# Altium PCB PCB2.PcbDoc
Units mm, origin at the board's own origin, x right, y up, seen from the top; angles counter-clockwise.
Board outline 150 x 116.5 mm, 2 copper layers (Top Layer, Bottom Layer); 98 components, 80 nets, 427 pads, 346 vias.
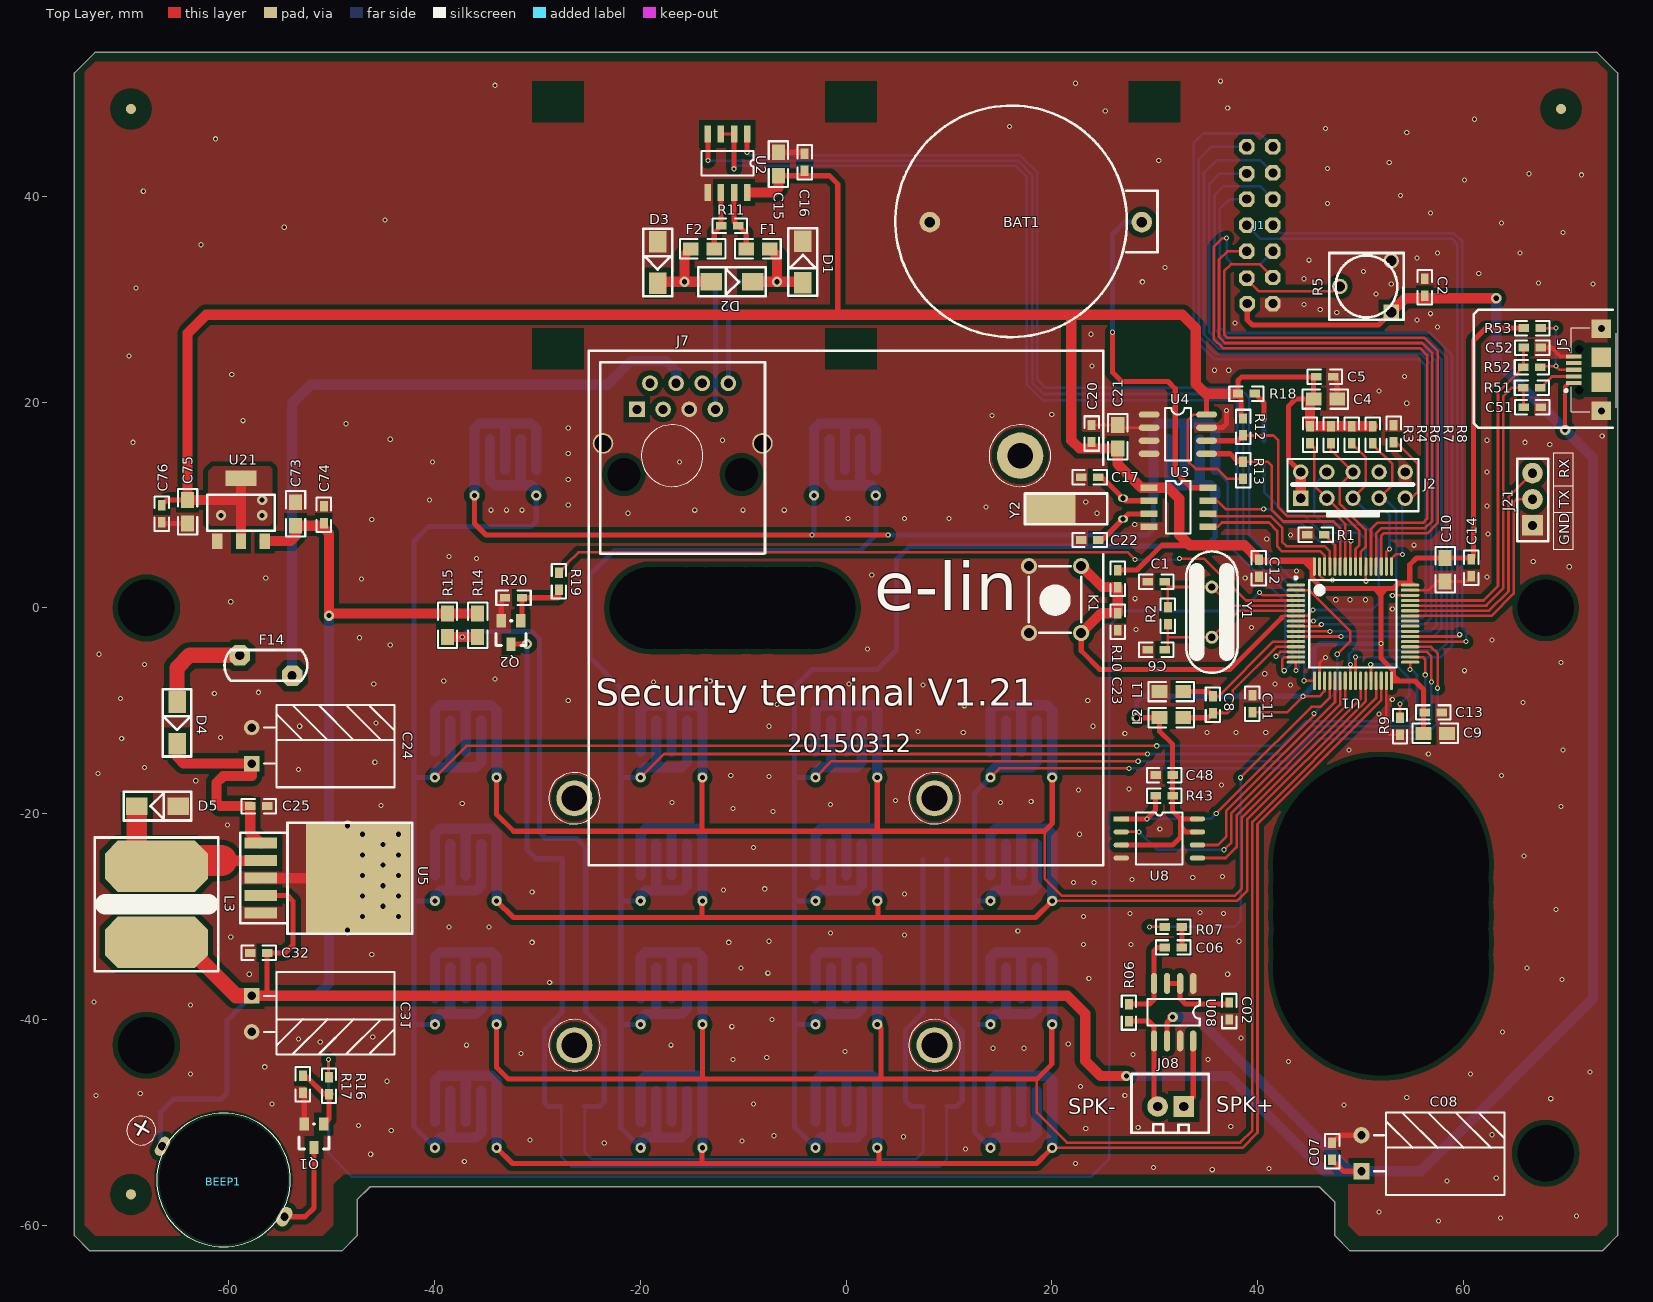
[diagram p0: Top Layer view]
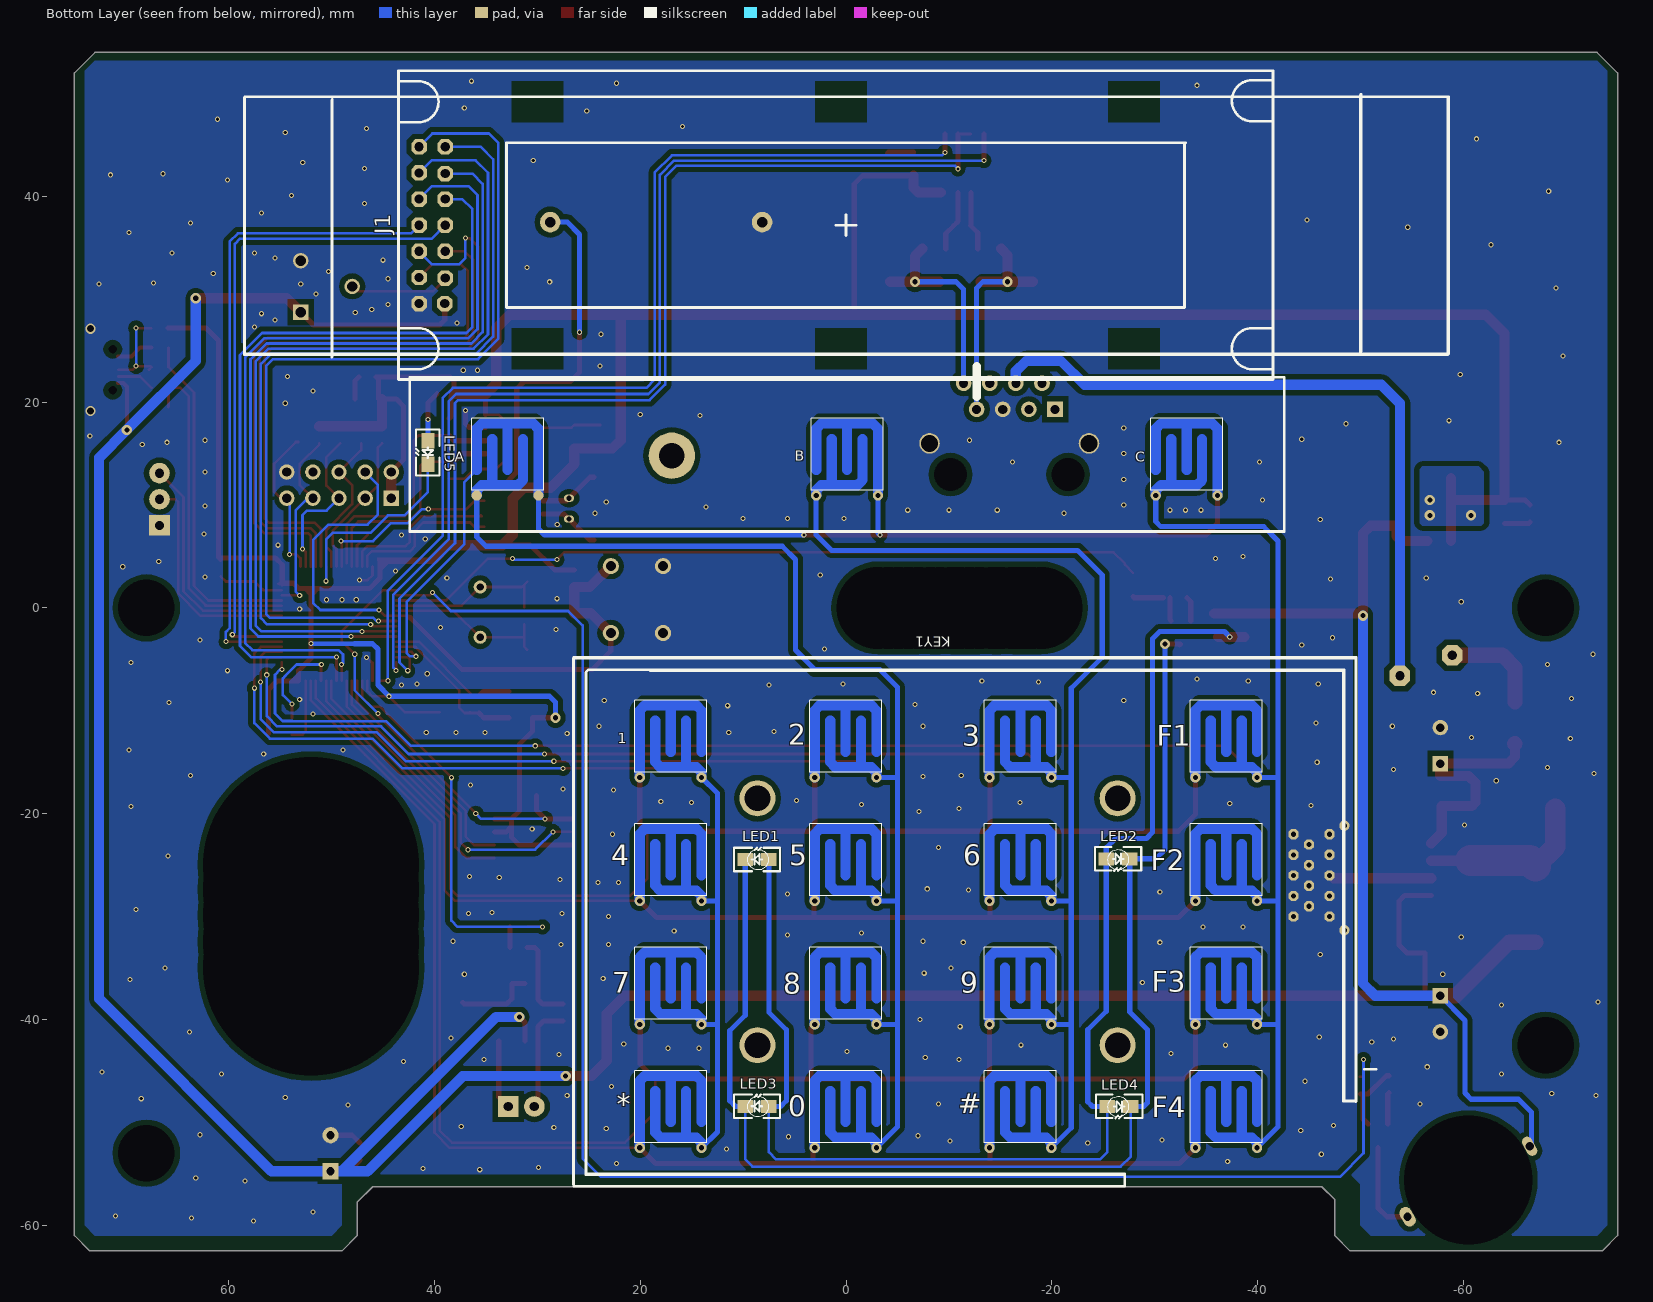
[diagram p1: Bottom Layer view, seen from below]

## Layer stack, top to bottom
Top Solder: solder mask 0.0102, Solder Resist, Dk 3.5
Top Layer: signal copper 0.0356
Dielectric1: dielectric 0.32, FR-4, Dk 4.8
Bottom Layer: signal copper 0.0356
Bottom Solder: solder mask 0.0102, Solder Resist, Dk 3.5

## Board outline
-75,-61 -73.5,-62.5 -49,-62.5 -47.5,-61 -47.5,-57.5 -46.25,-56.25 46,-56.25 47.5,-57.75 47.5,-61 49,-62.5 73.5,-62.5 75,-61 75,52 73,54 -73,54 -75,52

## Design rules (kind name [scope] priority, off if disabled: settings)
Clearance [All] p1: gap=0.5
PolygonConnect [All] p1: connectstyle=Direct reliefconductorwidth=0.5 reliefentries=4 polygonreliefangle="90 Angle" airgapwidth=0.254
RoutingVias [All] p1: holewidth=0.711 width=1.27 viastyle="Through Hole" minholewidth=0.711 minwidth=1.27 maxholewidth=0.711 maxwidth=1.27
SilkToSolderMaskClearance SilkscreenOverComponentPads [IsPad] p1: minsilkscreentomaskgap=0.254 clearancetoexposedcopper=TRUE
SolderMaskExpansion [All] p1: expansion=0.102
Width [All] p1: maxlimit=5 minlimit=0.254 preferedwidth=0.254
28 further rules are at their usual default settings.

## Components (designator, comment, footprint, x,y, rotation, side; value= is the part's Value field where it differs from the comment)
BAT1 "BATT" CR2032 28.75,37.5 r270 top locked
BEEP1 "BEEP" BEEP-12W -66.45,-52.324 r330 top locked
C1 "18p" 0603 30.988,2.54 r180 top locked
C02 "1uF" 0603 37.25,-40 r90 top locked
C2 "0.1uF" 0603 56.25,32 r270 top locked
C4 "0.1uF" 0603 47.344,22.464 r180 top locked
C5 "10uF" 0805 47.738,20.302 r180 top locked
C06 "0.1uF" 0603 31,-33 r0 top locked
C6 "18p" 0603 30.988,-4.064 r180 top locked
C07 "0.1uF" 0603 47.25,-52 r270 top locked
C08 "470uF" RB3.5-w#1 52.5,-47.75 r90 top locked
C8 "0.1uF" 0603 35.668,-10.216 r90 top locked
C9 "10uF/25V" 0805 58.42,-12.192 r180 top locked
C10 "10uF/25V" 0805 58.24,2.572 r90 top locked
C11 "0.1uF" 0603 39.5,-8.5 r270 top
C12 "0.1uF" 0603 40.132,3.048 r90 top locked
C13 "0.1uF" 0603 57.912,-10.16 r180 top locked
C14 "0.1uF" 0603 60.78,3.08 r90 top locked
C15 "10uF" 0805 -6.566,42.004 r90 top locked
C16 "0.1uF" 0603 -4.026,42.512 r90 top locked
C17 "18P" 0603 22.86,12.7 r0 top locked
C20 "0.1uF" 0603 23.876,17.78 r270 top locked
C21 "10uF" 0805 26.416,17.78 r270 top locked
C22 "18P" 0603 22.86,6.604 r0 top locked
C23 "0.1uF" 0603 26.416,-0.508 r270 top locked
C24 "470uF" RB3.5-w#2 -55.372,-8.128 r90 top locked
C25 "0.1uF" 0603 -56.268,-19.26 r180 top locked
C31 "470uF" RB3.5-w#3 -55.372,-44.704 r270 top locked
C32 "0.1uF" 0603 -57.912,-33.528 r0 top locked
C48 "0.1uF" 0603 30.1,-16.25 r0 top locked
C51 "22pF" 0603 65.875,19.5 r0 top locked
C52 "22pF" 0603 65.875,25.3 r0 top locked
C73 "10uF" 0805 -53.5,8 r90 top locked
C74 "0.1uF" 0603 -50.75,8.25 r90 top locked
C75 "10uF" 0805 -64,10.5 r270 top locked
C76 "0.1uF" 0603 -66.5,10 r270 top locked
D1 "TVS" SMB -4.2,31.6 r90 top
D2 "TVS" SMB -13.1,31.7 r0 top
D3 "TVS" SMB -18.3,35.6 r270 top
D4 "B340" SMB -65.024,-9.144 r270 top locked
D5 "B340" SMB -64.904,-19.26 r180 top locked
F1 "FUSE2" 0805 -9.7,34.9 r0 top
F2 "FUSE2" 0805 -12.8,34.9 r180 top
F14 "FUSE2" FUSE-RL60-050 -56.388,-5.588 r180 top locked
J1 "LCD-1602DB" LCD-1602B 43.5,22.2 r0 top locked
J2 "JTAG" JTAG_10 44.196,10.668 r0 top locked
J5 "microb usb" USB_micro 73.425,23.15 r90 top locked
J7 "RJ45" RJ45-1 -20.32,19.304 r180 top locked
J08 "SIP2A-2.54（带槽）" 2.54 27.75,-51 r0 top locked
J21 "2.54-TX" 2.54-TX 68.25,6.5 r90 top locked
K1 "KEY_M" KEY_M 22.86,4.064 r270 top locked
KEY1 "SW-17" KEY-17 -2.032,-18.796 r0 top locked
L1 "100R" 0805 30.48,-8.128 r0 top locked
L2 "100R" 0805 30.48,-10.668 r0 top locked
L3 "33uH" INDUCTOR-1212 -73.032,-22.308 r270 top locked
LED1 "" LED-0805 7.5,-24.45 r0 bottom locked
LED2 "" LED-0805 -25.3,-24.384 r180 bottom locked
LED3 "" LED-0805 7.5,-48.45 r0 bottom locked
LED4 "" LED-0805 -25.4,-48.45 r180 bottom locked
LED5 "LED-R" LED-0805 40.64,16.256 r270 bottom locked
Q1 "3904" SOT-23 -50.758,-50.171 r180 top locked
Q2 "3904" SOT-23 -31.605,-1.242 r180 top locked
R1 "10K" 0603 46.5,7.112 r180 top locked
R2 "1M" 0603 31.284,0.084 r270 top locked
R3 "10K" 0603 45.098,17.65 r270 top locked
R4 "10K" 0603 47.13,17.65 r270 top locked
R5 "10K" RM065-V1 48,31.25 r0 top locked
R06 "22K" 0603 27.5,-38.5 r270 top locked
R6 "10K" 0603 49.162,17.65 r270 top locked
R07 "10K" 0603 31,-31 r0 top locked
R7 "10K" 0603 51.194,17.65 r270 top locked
R8 "10K" 0603 53.226,16.126 r90 top locked
R9 "10K" 0603 53.848,-10.668 r270 top locked
R10 "10K" 0603 26.416,2.032 r90 top locked
R11 "120R" 0603 -10.466,37.156 r180 top locked
R12 "4.7K" 0603 38.6,16.764 r90 top locked
R13 "4.7K" 0603 38.6,14.224 r270 top
R14 "510R" 0805 -35.8,-0.532 r270 top locked
R15 "510R" 0805 -38.732,-0.532 r270 top locked
R16 "1K" 0603 -50.25,-45.599 r270 top locked
R17 "10K" 0603 -52.79,-47.123 r90 top locked
R18 "1K" 0603 39.751,20.828 r180 top locked
R19 "1K" 0603 -27.9,3.4 r270 top
R20 "10K" 0603 -33.144,0.992 r0 top locked
R43 "10K" 0603 31.75,-18.25 r180 top locked
R51 "22" 0603 67.5,21.4 r180 top locked
R52 "22" 0603 67.5,23.4 r180 top locked
R53 "1.5K" 0603 65.875,27.2 r0 top locked
U1 "STM32F103RCT6" LQFP64_N 49.276,-1.524 r0 top locked
U2 "SP3485" SOP-8 -9.614,46.068 r270 top locked
U3 "DS1302" SOP-8 29.464,11.684 r0 top locked
U4 "24C02" SO-8 29.464,18.796 r0 top locked
U5 "LM2596S_5.0" TO-263-5 -56.896,-22.86 r180 top locked
U8 "SST25VF016B" SOIC-8 26.75,-20.5 r0 top locked
U08 "8002" so-8 33.75,-36.5 r270 top locked
U21 "LM1117" SOT-223 -61.1,6.5 r0 top locked
Y1 "8MHz" XTAL_US 35.56,2.032 r270 top locked
Y2 "32.768KHz" cs-308 25.4,8.128 r180 top locked

## Footprints (in the part's own frame and the unit in brackets; to place one, negate y for a bottom-side part, rotate by r counter-clockwise, add the part's x,y. Pads: shape width x height; smd on the part's side, far side on the other; paste and mask are expansions set on the pad)
2.54 [mm]
  rect 2x2 hole 0.9: 1(5.08,2.54)
  round 2 hole 0.9: 2(2.54,2.54)
  silkscreen extent 0,0 7.5,5.7
2.54-TX [mm]
  round 2 hole 0.9: 1(6.604,1.524) 2(4.064,1.524)
  rect 2x2 hole 0.9: 3(1.524,1.524)
  silkscreen extent 0,0 8,3
0603 [mil]
  rect 40x30 smd: 1(0,0) 2(65,0)
  silkscreen extent -33,-28 98,28
0805 [mil]
  rect 60x50 smd: 1(0,0) 2(90,0)
  silkscreen extent -42,-37 132,37
BEEP-12W [mm]
  oval 1x2 hole 0.8: 1(0,0)
  oval 1.2x2 hole 0.8: 2(13.7,0)
CR2032 [mm]
  round 2 hole 1: 1(0,0) 2(0,-20.6)
  silkscreen extent -11.32,-23.95 11.18,1.52
cs-308 [mm]
  oval 1x0.7 hole 0.5: 1(-1.524,-0.508) 2(-1.524,-2.54)
  rect 5x3 smd: 3(5.588,-1.524)
  silkscreen extent 0,-3 8,0
FUSE-RL60-050 [mm]
  oct 2x2 hole 0.9: 1(-2.55,1) 2(2.55,-1)
  silkscreen extent -4.02,-1.5 4.02,1.5
INDUCTOR-1212 [mm]
  oct 5x10 smd: 1(2.8,6) 2(10.2,6)
  silkscreen extent 0,0 13,12
JTAG_10 [mm]
  rect 1.5x1.5 hole 0.9: 1(0,0)
  round 1.5 hole 0.9: 2(0,2.54) 3(2.54,0) 4(2.54,2.54) 5(5.08,0) 6(5.08,2.54) 7(7.62,0) 8(7.62,2.54) 9(10.16,0) 10(10.16,2.54)
  silkscreen extent -1.27,-1.78 11.43,3.81
KEY-17 [mm]
  round 1 hole 0.5: 1(22.075,2.325) 2(16.075,2.325) 3(5.075,2.325) 4(-0.925,2.325) 5(-11.925,2.325) 6(-17.925,2.325) 7(-31.925,2.325) 8(-37.925,2.325) 9(22.075,-9.675) 10(16.075,-9.675) 11(5.075,-9.675) 12(-0.925,-9.675) 13(-11.925,-9.675) 14(-17.925,-9.675) 15(-31.925,-9.675) 16(-37.925,-9.675) 17(22.075,-21.675) 18(16.075,-21.675) 19(5.075,-21.675) 20(-0.925,-21.675) 21(-11.925,-21.675) 22(-17.925,-21.675) 23(-31.925,-21.675) 24(-37.925,-21.675) 25(22.075,-33.675) 26(16.075,-33.675) 27(5.075,-33.675) 28(-0.925,-33.675) 29(-11.925,-33.675) 30(-17.925,-33.675) 31(-31.925,-33.675) 32(-37.925,-33.675) 35(-1.075,29.725) 36(4.925,29.725) 37(-34.075,29.725) 38(-28.075,29.725)
  round 1 smd far side: 33(31.925,29.725) 34(37.925,29.725)
  Bottom Layer lines w1: -37.925,-33.675 -37.925,-33.175 -37.425,-32.675 -33.925,-32.675 -33.425,-32.175 -33.425,-28.175 ; -37.925,-31.175 -37.925,-27.175 -37.425,-26.675 -32.425,-26.675 -31.925,-27.175 -31.925,-33.675 ; -37.925,-21.675 -37.925,-21.175 -37.425,-20.675 -33.925,-20.675 -33.425,-20.175 -33.425,-16.175 ; -37.925,-19.175 -37.925,-15.175 -37.425,-14.675 -32.425,-14.675 -31.925,-15.175 -31.925,-21.675 ; -37.925,-9.675 -37.925,-9.175 -37.425,-8.675 -33.925,-8.675 -33.425,-8.175 -33.425,-4.175 ; -37.925,-7.175 -37.925,-3.175 -37.425,-2.675 -32.425,-2.675 -31.925,-3.175 -31.925,-9.675 ; -37.925,2.325 -37.925,2.825 -37.425,3.325 -33.925,3.325 -33.425,3.825 -33.425,7.825 ; -37.925,4.825 -37.925,8.825 -37.425,9.325 -32.425,9.325 -31.925,8.825 -31.925,2.325 ; -36.425,-32.675 -36.425,-28.175 ; -36.425,-20.675 -36.425,-16.175 ; -36.425,-8.675 -36.425,-4.175 ; -36.425,3.325 -36.425,7.825 ; -34.925,-31.175 -34.925,-26.675 ; -34.925,-19.175 -34.925,-14.675 ; -34.925,-7.175 -34.925,-2.675 ; -34.925,4.825 -34.925,9.325 ; -34.075,29.725 -34.075,36.225 -33.575,36.725 -28.575,36.725 -28.075,36.225 -28.075,32.225 ; -32.575,35.225 -32.575,31.225 -32.075,30.725 -28.575,30.725 -28.075,30.225 -28.075,29.725 ; -31.075,32.225 -31.075,36.725 ; -29.575,30.725 -29.575,35.225 ; -17.925,-33.675 -17.925,-33.175 -17.425,-32.675 -13.925,-32.675 -13.425,-32.175 -13.425,-28.175 ; -17.925,-31.175 -17.925,-27.175 -17.425,-26.675 -12.425,-26.675 -11.925,-27.175 -11.925,-33.675 ; -17.925,-21.675 -17.925,-21.175 -17.425,-20.675 -13.925,-20.675 -13.425,-20.175 -13.425,-16.175 ; -17.925,-19.175 -17.925,-15.175 -17.425,-14.675 -12.425,-14.675 -11.925,-15.175 -11.925,-21.675 ; -17.925,-9.675 -17.925,-9.175 -17.425,-8.675 -13.925,-8.675 -13.425,-8.175 -13.425,-4.175 ; -17.925,-7.175 -17.925,-3.175 -17.425,-2.675 -12.425,-2.675 -11.925,-3.175 -11.925,-9.675 ; -17.925,2.325 -17.925,2.825 -17.425,3.325 -13.925,3.325 -13.425,3.825 -13.425,7.825 ; -17.925,4.825 -17.925,8.825 -17.425,9.325 -12.425,9.325 -11.925,8.825 -11.925,2.325 ; -16.425,-32.675 -16.425,-28.175 ; -16.425,-20.675 -16.425,-16.175 ; -16.425,-8.675 -16.425,-4.175 ; -16.425,3.325 -16.425,7.825 ; -14.925,-31.175 -14.925,-26.675 ; -14.925,-19.175 -14.925,-14.675 ; -14.925,-7.175 -14.925,-2.675 ; -14.925,4.825 -14.925,9.325 ; -1.075,29.725 -1.075,36.225 -0.575,36.725 4.425,36.725 4.925,36.225 4.925,32.225 ; -0.925,-33.675 -0.925,-33.175 -0.425,-32.675 3.075,-32.675 3.575,-32.175 3.575,-28.175 ; -0.925,-31.175 -0.925,-27.175 -0.425,-26.675 4.575,-26.675 5.075,-27.175 5.075,-33.675 ; -0.925,-21.675 -0.925,-21.175 -0.425,-20.675 3.075,-20.675 3.575,-20.175 3.575,-16.175 ; -0.925,-19.175 -0.925,-15.175 -0.425,-14.675 4.575,-14.675 5.075,-15.175 5.075,-21.675 ; -0.925,-9.675 -0.925,-9.175 -0.425,-8.675 3.075,-8.675 3.575,-8.175 3.575,-4.175 ; -0.925,-7.175 -0.925,-3.175 -0.425,-2.675 4.575,-2.675 5.075,-3.175 5.075,-9.675 ; -0.925,2.325 -0.925,2.825 -0.425,3.325 3.075,3.325 3.575,3.825 3.575,7.825 ; -0.925,4.825 -0.925,8.825 -0.425,9.325 4.575,9.325 5.075,8.825 5.075,2.325 ; 0.425,35.225 0.425,31.225 0.925,30.725 4.425,30.725 4.925,30.225 4.925,29.725 ; 0.575,-32.675 0.575,-28.175 ; 0.575,-20.675 0.575,-16.175 ; 0.575,-8.675 0.575,-4.175 ; 0.575,3.325 0.575,7.825 ; 1.925,32.225 1.925,36.725 ; 2.075,-31.175 2.075,-26.675 ; 2.075,-19.175 2.075,-14.675 ; 2.075,-7.175 2.075,-2.675 ; 2.075,4.825 2.075,9.325 ; 3.425,30.725 3.425,35.225 ; 16.075,-33.675 16.075,-33.175 16.575,-32.675 20.075,-32.675 20.575,-32.175 20.575,-28.175 ; 16.075,-31.175 16.075,-27.175 16.575,-26.675 21.575,-26.675 22.075,-27.175 22.075,-33.675 ; 16.075,-21.675 16.075,-21.175 16.575,-20.675 20.075,-20.675 20.575,-20.175 20.575,-16.175 ; 16.075,-19.175 16.075,-15.175 16.575,-14.675 21.575,-14.675 22.075,-15.175 22.075,-21.675 ; 16.075,-9.675 16.075,-9.175 16.575,-8.675 20.075,-8.675 20.575,-8.175 20.575,-4.175 ; 16.075,-7.175 16.075,-3.175 16.575,-2.675 21.575,-2.675 22.075,-3.175 22.075,-9.675 ; 16.075,2.325 16.075,2.825 16.575,3.325 20.075,3.325 20.575,3.825 20.575,7.825 ; 16.075,4.825 16.075,8.825 16.575,9.325 21.575,9.325 22.075,8.825 22.075,2.325 ; 17.575,-32.675 17.575,-28.175 ; 17.575,-20.675 17.575,-16.175 ; 17.575,-8.675 17.575,-4.175 ; 17.575,3.325 17.575,7.825 ; 19.075,-31.175 19.075,-26.675 ; 19.075,-19.175 19.075,-14.675 ; 19.075,-7.175 19.075,-2.675 ; 19.075,4.825 19.075,9.325 ; 31.925,29.725 31.925,36.225 32.425,36.725 37.425,36.725 37.925,36.225 37.925,32.225 ; 33.425,35.225 33.425,31.225 33.925,30.725 37.425,30.725 37.925,30.225 37.925,29.725 ; 34.925,32.225 34.925,36.725 ; 36.425,30.725 36.425,35.225
KEY_M [mil]
  round 62 hole 38: 1(0,0) 1(255.91,0) 2(0,-200) 2(255.91,-200)
  silkscreen extent 0,-200 255,0
LCD-1602B [mm]
  oct 1.5x1.5 hole 0.9: 1(-4.5,7.38) 2(-2,7.38) 3(-4.54,9.86) 4(-2,9.92) 5(-4.54,12.46) 6(-2,12.46) 7(-4.54,15) 8(-2,15) 9(-4.54,17.54) 10(-2,17.54) 11(-4.54,20.02) 12(-2,20.08) 13(-4.54,22.62) 14(-2,22.62)
LED-0805 [mil]
  rect 60x50 smd: 1(0,0) 2(90,0)
  silkscreen extent -43,-46 134,45
LQFP64_N [mm] "Thin QFP, 64-Leads, Body 10x10mm, Pitch 0.5mm, IPC Medium Density"
  oval 1.8x0.3 smd: 1(-5.55,3.75) 2(-5.55,3.25) 3(-5.55,2.75) 4(-5.55,2.25) 5(-5.55,1.75) 6(-5.55,1.25) 7(-5.55,0.75) 8(-5.55,0.25) 9(-5.55,-0.25) 10(-5.55,-0.75) 11(-5.55,-1.25) 12(-5.55,-1.75) 13(-5.55,-2.25) 14(-5.55,-2.75) 15(-5.55,-3.25) 16(-5.55,-3.75) 33(5.55,-3.75) 34(5.55,-3.25) 35(5.55,-2.75) 36(5.55,-2.25) 37(5.55,-1.75) 38(5.55,-1.25) 39(5.55,-0.75) 40(5.55,-0.25) 41(5.55,0.25) 42(5.55,0.75) 43(5.55,1.25) 44(5.55,1.75) 45(5.55,2.25) 46(5.55,2.75) 47(5.55,3.25) 48(5.55,3.75)
  oval 0.3x1.8 smd: 17(-3.75,-5.55) 18(-3.25,-5.55) 19(-2.75,-5.55) 20(-2.25,-5.55) 21(-1.75,-5.55) 22(-1.25,-5.55) 23(-0.75,-5.55) 24(-0.25,-5.55) 25(0.25,-5.55) 26(0.75,-5.55) 27(1.25,-5.55) 28(1.75,-5.55) 29(2.25,-5.55) 30(2.75,-5.55) 31(3.25,-5.55) 32(3.75,-5.55) 49(3.75,5.55) 50(3.25,5.55) 51(2.75,5.55) 52(2.25,5.55) 53(1.75,5.55) 54(1.25,5.55) 55(0.75,5.55) 56(0.25,5.55) 57(-0.25,5.55) 58(-0.75,5.55) 59(-1.25,5.55) 60(-1.75,5.55) 61(-2.25,5.55) 62(-2.75,5.55) 63(-3.25,5.55) 64(-3.75,5.55)
  silkscreen extent -5.67,-4.25 4.25,4.57, body extent -5,-5 5,5, height 1.6
RB3.5-w#1 [mil]
  rect 62x62 hole 32: 1(-275.59,94.49)
  round 62 hole 32: 2(-137.8,94.49)
  silkscreen extent -366,-453 -51,47
RB3.5-w#2 [mil]
  rect 59.06x59.06 hole 32: 1(-275.59,94.49)
  round 59.06 hole 32: 2(-137.8,94.49)
  silkscreen extent -366,-453 -51,47
RB3.5-w#3 [mil]
  rect 59.06x59.06 hole 32: 1(-275.59,-94.49)
  round 59.06 hole 32: 2(-137.8,-94.49)
  silkscreen extent -366,-47 -51,453
RJ45-1 [mil]
  rect 60x60 hole 35: 1(0,0)
  round 60 hole 35: 2(-50,-100) 3(-100,0) 4(-150,-100) 5(-200,0) 6(-250,-100) 7(-300,0) 8(-350,-100)
  round 78.74 hole 64.96: 9(129.92,130) 10(-480.31,130)
  oct 0x0 hole 125.98: ""(-400,250) ""(50,250)
  silkscreen extent -490,-180 140,553
RM065-V1 [mm]
  rect 1.5x1.5 hole 1: 1(5,-2.5)
  round 1.5 hole 1: 2(0,0) 3(5,2.5)
  silkscreen extent -1.02,-3.25 6.2,3.25
SMB [mm]
  rect 2.1x1.7 smd: 1(0,0) 2(4.05,0)
  silkscreen extent -1.25,-1.4 5.3,1.4
SO-8 [mil]
  oval 80x24 smd: 1(0,0) 2(0,-50) 3(0,-100) 4(0,-150) 5(220,-150) 6(220,-100) 7(220,-50) 8(220,0)
  silkscreen extent 60,-175 160,25
so-8 [mil]
  oval 80x24 smd: 1(0,0) 2(0,-50) 3(0,-100) 4(0,-150) 5(220,-150) 6(220,-100) 7(220,-50) 8(220,0)
  silkscreen extent 60,-175 160,25
SOIC-8 [mm]
  rect 1.5x0.48 smd: 1(0,0)
  oval 1.5x0.48 smd: 2(0,-1.27) 3(0,-2.54) 4(0,-3.81) 5(7.41,-3.81) 6(7.41,-2.54) 7(7.41,-1.27) 8(7.41,0)
  silkscreen extent 1.43,-4.44 5.97,0.64
SOP-8 [mil]
  rect 65x25 smd: 1(0,0) 2(0,-50) 3(0,-100) 4(0,-150) 5(224.41,-150) 6(224.41,-100) 7(224.41,-50) 8(224.41,0)
  silkscreen extent 65,-175 159,25
SOT-23 [mil]
  rect 36x50 smd: 1(0,0) 2(75,0) 3(37.5,90)
  silkscreen extent -20,0 95,95
SOT-223 [mm]
  rect 1x1.5 smd: 1(0,0) 2(2.3,0) 3(4.6,0)
  rect 3x1.5 smd: 4(2.3,6.096)
  silkscreen extent -1,1.02 5.59,4.52
TO-263-5 [mm]
  rect 3.176x1.07 smd: 1(0,0) 2(0,1.7) 3(0,3.4) 4(0,5.1) 5(0,6.8)
  round 1 hole 0.5: 6(-8.45,-1.695) 8(-8.45,8.465)
  rect 10.16x10.668 smd: 7(-9.5,3.404)
  silkscreen extent -14.73,-2 1.98,8.8
USB_micro [mm]
  rect 1.8x1.9 smd: 0(-4,0) 0(4,0)
  round 0 hole 0.8: 0(-2,2.15) 0(2,2.15)
  rect 1.9x1.9 smd: 0(-1.2,0) 0(1.2,0)
  rect 0.4x1.5 smd: 1(-1.3,2.675) 2(-0.65,2.675) 3(0,2.675) 4(0.65,2.675) 5(1.3,2.675)
  silkscreen extent -4.06,-1.45 4.06,3.55
XTAL_US [mil]
  round 50 hole 28: 1(0,0) 2(192.13,0)
  silkscreen extent -136,-98 328,98

## Part data
BAT1: library part BAT
C1 C02 C6: library part CAP, "陶瓷电容"
C2 C4 C5 C06 C07 C08 C8 C9 C10 C11 C12 C13 C14 C15 C16 C20 C21 C23 C24 C31 C48 C51 C52 C73 C74 C75 C76: library part CAP
C17 C22 C25 C32: library part C
D1 D2 D3: "SMBJ12CA"
D4: library part 1N5824(SS54), "肖特基二极管"
D5: library part DIODE
F1 F2: "SMD0805P010TS"
F14: "RL60-050"
J2: library part JTAG_10
J08: library part SIP2A-2.50（带槽）
L1 L2 L3: library part INDUCTOR
LED1 LED2 LED3 LED4: library part LED, "蓝色LED"
LED5: library part LED-RED, "绿色LED"
Q1 Q2: library part NPN1
R1 R9 R10 R14 R15 R43 R51 R52 R53: library part RES1
R2 R3 R4 R06 R6 R07 R7 R8 R11 R12 R13: library part RES-1%, "高精度电阻"
R5: library part POT2
R16 R17 R19 R20: library part R
R18: library part Res
U1: library part STM32F103RBT6
U2: library part MAX3485
U3: "实时时钟"
U4: library part 24C256
U5: "3A开关电源芯片"
U8: library part W25X16, "W25X16;SST25VF016;MX25L1605"
Y1 Y2: library part XTAL, "Crystal Oscillator"

## Free pads (board coordinates)
  oct 1x1 hole 0.5: 0(-43.5,-22) 1(-43.5,-24) 2(-43.5,-26) 3(-43.5,-28) 4(-43.5,-30) 5(-45,-23) 6(-45,-25) 7(-45,-27) 8(-45,-29) 9(-47,-30) 10(-47,-28) 11(-47,-26) 12(-47,-24) 13(-47,-22)
  round 1 smd mask+1: 2(-69.5,-57) 2(-69.5,48.5) 2(69.5,48.5)
  round 0 hole 5.5: ""(-68,-42.5) ""(-68,0) ""(68,-53) ""(68,0)
  round 0 hole 12.5: ""(-60.5,-55.6)
  round 3.5 hole 2.5: ""(-26.4,-42.5) ""(-26.4,-18.5) ""(8.6,-42.5) ""(8.6,-18.5)
  round 0 hole 8: ""(-18.999,0) ""(-18,0) ""(-17.069,0) ""(-16.2,0) ""(-15.062,0) ""(-14.2,0) ""(-13.005,0) ""(-12,0) ""(-11.049,0) ""(-10.2,0) ""(-9.144,0) ""(-8.2,0) ""(-7.061,0) ""(-6.1,0) ""(-5.105,0) ""(-4.1,0) ""(-3.099,0)
  round 4.5 hole 2.5: ""(16.925,14.8)
  round 0 hole 21: ""(51.994,-34.95) ""(51.994,-32.461) ""(51.994,-29.87) ""(51.994,-27.356) ""(51.994,-24.968)

## Via types
v1: diameter 0.5, hole 0.3, Top Layer to Bottom Layer, tented both sides, 332 vias
v2: diameter 1, hole 0.5, Top Layer to Bottom Layer, tented both sides, 12 vias
v3: diameter 1, hole 0.7, Top Layer to Bottom Layer, tented both sides, 2 vias

## Nets (pads, with @x,y where several pads share a name; then routed paths per layer and width w, separated by ;. In a path a pad name is that pad's centre, name@x,y a point inside that pad or via, vN(x,y) a via of type N, cw(c..) or ccw(c..) an arc to the next point about the centre after c; other vN are vias at no path point)
485_A: D2.1 D3.2 F2.2 J7.7 | length 23.5
  Top Layer w1: D3.2@-18.15,31.7 v2(-15.7,31.7) ; F2.2 -15.7,34.286 v2(-15.7,31.7) ; D2.1 v2(-15.7,31.7)
  Bottom Layer w0.5: v2(-15.7,31.7) -13.3,31.7 -12.7,31.1 J7.7
485_B: D1.1 D2.2 F1.2 J7.8 | length 22.4
  Top Layer w1: D2.2 v2(-6.7,31.7) ; F1.2 -6.7,34.186 v2(-6.7,31.7) ; D1.1@-4.3,31.7 v2(-6.7,31.7)
  Bottom Layer w0.5: J7.8 -11.43,30.97 -10.7,31.7 v2(-6.7,31.7)
BEEP: R16.1 U1.3 | length 161.5
  Top Layer w0.254: v1(-50.3,-43.9) -50.3,-45.549 R16.1@-49.949,-45.549 ; v1(40.2,1.5) 40.474,1.226 U1.3 42.274,1.226
  Bottom Layer w0.254: v1(-50.3,-43.9) -50.3,-53 -48,-55.3 23.8,-55.3 25.6,-53.5 25.6,-1.7 27,-0.3 38.4,-0.3 v1(40.2,1.5)
DAC_OUT1: R07.1 U1.20 | length 38
  Top Layer w0.254: v1(29.5,-31) R07.1 ; v1(38.358,-16.5) 45.239,-9.619 46.131,-9.619 47.026,-8.724 U1.20
  Bottom Layer w0.254: v1(29.5,-31) 37.75,-31 38.358,-30.392 v1(38.358,-16.5)
DS_IO: U1.61 U3.6 | length 15.4
  Top Layer w0.254: U3.6@35.5,8.992 35.408,8.9 41.3,8.9 42.4,7.8 42.4,6.4 42.8,6 46.5,6 47.026,5.474 U1.61
DS_RST: U1.62 U3.5 | length 14.8
  Top Layer w0.254: U3.5 36.1,7.874 36.531,8.305 41.095,8.305 41.9,7.5 41.9,6 42.4,5.5 46.1,5.5 46.526,5.074 U1.62
DS_SCLK: U1.57 U3.7 | length 18.1
  Top Layer w0.254: U3.7 36.086,10.414 36.9,9.6 v1(40.6,9.6) ; U1.57 49.026,6.426 v1(49.1,6.5)
  Bottom Layer w0.254: v1(40.6,9.6) 41.234,9.6 42.588,8.246 44.221,8.246 45.967,6.5 v1(49.1,6.5)
F_CS: R43.2 U1.2 U8.1 | length 42.1
  Top Layer w0.254: v1(35.986,-19.986) 45.5,-10.471 v1(45.5,-10.25) ; U1.2 45.024,1.726 49,-2.25 49,-3.25 v1(47.75,-4.5)
  Top Layer w0.5: U8.1 v1(29.25,-20.5) 30.099,-19.651 R43.2
  Bottom Layer w0.254: v1(29.25,-20.5) 35.471,-20.5 v1(35.986,-19.986) ; v1(45.5,-10.25) 47.75,-8 v1(47.75,-4.5)
GND: BAT1.2 C1.2 C2.1 C02.1 C4.1 C5.1 C6.2 C07.1 C08.2 C9.1 C10.1 C11.1 C12.1 C13.1 C14.1 C15.2 C16.2 C17.1 C20.1 C21.1 C22.1 C23.2 C24.2 C25.1 C31.2 C32.1 C48.1 C51.2 C52.2 C73.2 C74.2 C75.2 C76.2 D1.2 D3.1 D5.1 J1.2 J2.10 J5.0@73.425,19.15 J5.0@73.425,27.15 J5.5 J7.5 J7.9 J7.10 J21.3 K1.2 L1.1 pad.0 pad.1 pad.2@-43.5,-26 pad.3 pad.4 pad.5 pad.6 pad.7 pad.8 pad.9 pad.10 pad.11 pad.12 pad.13 Q1.2 Q2.2 R1.2 R5.3 R8.2 R9.2 R17.1 R20.1 U1.18 U1.31 U1.47 U1.63 U2.5 U3.4 U4.1 U4.2 U4.3 U4.4 U4.7 U5.3 U5.5 U5.6 U5.7 U5.8 U08.1 U8.4 U08.7 U21.1 Y2.3 | length 56.1
  Top Layer w0.254: C20.1 C21.1 26.67,17.526 U4.2 ; U1.18 46.026,-5.326 46.074,-5.326 v1(46.6,-4.8) ; U1.63 46.026,3.174 46.5,2.7 v1(47.3,2.7) ; U1.31 52.526,-12.026 52.819,-12.319 R9.2 ; U1.47 56.626,1.726 56.9,2 57.472,2.572 C10.1 60.272,2.572 C14.1
  Top Layer w0.4: C52.2 68.6,25.3 69.45,24.45 J5.5
  Top Layer w0.5: C76.2 -66.365,8.214 C75.2 ; R17.1 -52.663,-47.25 Q1.2 ; Q2.2 -33.51,0.626 R20.1 ; C15.2 -4.153,44.29 C16.2 ; U4.7 36.626,17.526 37,17.9 v1(37,19.2) ; C07.1 48,-51.25 C08.2 ; C4.1 47.738,22.07 C5.1
  Top Layer w1: U5.3 -47.4,-26.26 U5.7
  other v1: 57.6,-59.6 63.6,-59.3 71,-59.1 51.8,-58.7 58.4,-55.7 63.2,-55.4 35.6,-54.6 41.1,-54.5 29.9,-54.4 22.3,-54 -37.1,-53.8 -46.2,-53.1 11.6,-52.6 -23.5,-52 -10.1,-51.8 -30.7,-51.7 5.6,-51.4 -7,-51.3 62.8,-51.2 -44.2,-50.8 23.3,-50.6 28.4,-50.5 37.4,-50.4 -47.4,-50.3 48.4,-48.3 -55.8,-48.2 -9,-48.2 68.5,-47.7 54.5,-47.6 -72.9,-47.4 27.1,-47.4 -68.6,-47.2 22.8,-46.5 -44.6,-46 -63.7,-45.3 60.7,-45.3 72.3,-45.1 -56.5,-44.6 43,-44.1 -11,-43.9 35.2,-43.9 -7.7,-43.7 27.9,-43.4 -31.6,-43.3 -0.1,-43.1 14.3,-42.8 17.3,-42.8 -36.9,-42.5 -17,-42.5 21.6,-42.4 -51.1,-42.2 -53.2,-41.9 38.4,-41.8 -46,-41.7 63.8,-41.2 -11.1,-40.7 -7.2,-40 -63.7,-38.6 -73.1,-38.3 -28.8,-36.4 69.6,-36.1 23.6,-36 -58,-35.6 37.1,-35.6 -7.6,-35.5 -10.2,-35 66.2,-35 -46.1,-33.7 23.1,-32.7 27.7,-32.7 -30.5,-32.5 -11.4,-32.5 -7.5,-32.4 38.2,-32.4 -59.8,-32 5.7,-31.8 -1.5,-31.6 16.7,-31.4 -38.6,-31 -34.7,-31 23.1,-30 27.6,-29.7 36.7,-29.7 34.4,-29.6 69,-29.3 5.7,-27.8 -30.5,-27.6 -11.9,-27.4 -7.9,-27.3 22.1,-26.7 24.1,-26.7 27.8,-26.4 33.7,-26.2 36.6,-26.1 65.9,-24.1 -9,-23.3 22.7,-22 30.5,-21.5 -60.1,-21.1 -7.1,-19.8 -11,-19.5 69.5,-19.3 -45.2,-19.2 -1.5,-19.1 -37.3,-19 -16.9,-18.9 15,-18.9 18,-18.8 4.8,-18.7 22.6,-17.7 27.5,-17.6 36.5,-17.2 -63.2,-16.8 -7.5,-16.4 -11.2,-16.3 63.7,-16.3 -72.7,-16.1 -53.2,-15.7 -68.2,-15.5 -45.8,-15 56.6,-14.2 48.9,-13.8 69.7,-13.8 -70.4,-12.7 -60.8,-12.6 27.1,-12.2 11.4,-12.1 35.1,-12.1 37.9,-12.1 40.8,-12.1 7,-12 -53.1,-11.5 -7.5,-11.5 24,-11.5 -45.7,-11.2 51.8,-10.3 11.5,-9.5 -6.7,-9.4 65.8,-9.2 -27,-9 23.5,-9 53.1,-8.9 -70.5,-8.8 -61.4,-8.3 -57.1,-8.2 7.5,-7.5 43.2,-7.5 -45.9,-7.4 0.3,-7.4 41.7,-7.4 -18.7,-7.2 -39.1,-7.1 -13.2,-7.1 -34.1,-6.9 40.7,-6.4 60.1,-6.1 -68.2,-5.5 69.5,-5.3 -72.6,-4.5 2.1,-4 -44.3,-3.6 62.8,-3.1 -47.3,-2.9 28.2,-2.1 39.4,-1.9 53.1,-0.1 -59.8,0.6 47.6,0.8 49,0.8 50.5,0.8 28.1,0.9 -47.1,2.8 -56.4,2.9 38.8,2.9 62.3,3 2.5,3.2 43.8,3.6 70.3,4 66.8,4.5 -35.9,4.8 -38.6,5 55.2,6.1 40.9,6.7 43.2,7.1 62.4,7.2 28.067,8.103 -46.1,8.6 0.2,8.7 5.7,8.7 10,8.7 -21.2,9.2 24.4,9.2 -34.5,9.5 -33,9.5 -31.5,9.5 -14.7,9.5 -10,9.5 -6,9.5 13.6,9.8 62.3,9.9 -27,10 23.3,10.3 -40.5,10.5 -27,12.5 62.3,13.2 -40.2,14.2 -16.2,14.2 -27,15 68.4,15.9 -69.3,16.1 66,16.1 -12,16.3 62.3,16.3 -44.3,16.4 73.5,16.7 -27,17.5 -48.6,17.9 -58.6,18.2 14.2,18.7 20,18.8 54.5,19.9 51.8,21.1 54.3,22.5 -59.7,22.7 35.8,23.1 37.2,23.1 23.9,23.5 -69.7,24.5 23.8,26.6 57.5,27.3 37.8,27.7 55.5,28 56.8,28.6 47.7,28.7 46.1,29 44.5,29.5 51.5,30.5 -69,31.1 53,31.5 72.6,31.5 67.3,31.6 28.8,31.7 44.5,32 61.5,32.5 50.3,32.7 31,33.1 45,33.8 55.5,34 57.5,34.5 65.5,34.5 -62.7,35.3 69.7,36.5 -54.6,37 63.7,37.4 -44.8,37.7 56.8,38.4 46.8,39.3 53.9,40.1 -68.3,40.5 60.1,41.6 71.5,42.1 66.4,42.2 46.8,42.7 52.8,43.3 30.4,43.5 -61.3,45.6 54.5,46.2 46.6,46.6 15.9,46.8 61.1,47.5 25.2,48.3 37.1,48.6 -34.1,50.8 22.3,51 36.4,51.2
  other v3: 73.425,19.15 73.425,27.15
I2C1_SCL: R12.1 U1.58 U4.6 | length 24.9
  Top Layer w0.254: R12.1 41.536,16.764 42,16.3 42,9.8 42.9,8.9 47.8,8.9 48.526,8.174 U1.58@48.526,4.374
  Top Layer w0.5: U4.6 38.092,16.256 R12.1
I2C1_SDA: R13.1 U1.59 U4.5 | length 22.7
  Top Layer w0.254: 38.1,14.224 40.976,14.224 41.4,13.8 41.4,9.5 42.5,8.4 47.4,8.4 48.026,7.774 U1.59
  Top Layer w0.5: U4.5 37.338,14.986 38.1,14.224 R13.1
JTCK: J2.9 R8.1 U1.49 | length 15
  Top Layer w0.254: U1.49 53.026,4.817 53.416,5.207 v1(54.077,5.207) ; R8.1 53.474,16.126 55.6,14 55.6,11.3 54.968,10.668 J2.9
  Bottom Layer w0.254: v1(54.077,5.207) 54.077,10.389 J2.9
JTDI: J2.5 R6.2 U1.50 | length 15.7
  Top Layer w0.254: R6.2 50.5,14.661 50.5,11.892 J2.5 ; U1.50 52.526,5.434 v1(52.832,5.74)
  Bottom Layer w0.254: J2.5 50.495,9.449 52.4,9.449 52.832,9.017 v1(52.832,5.74)
JTDO: J2.6 R4.2 U1.55 | length 14.6
  Top Layer w0.254: R4.2 47.13,15.354 J2.6 48,11.932 48,10.1 50.5,7.6 50.5,5.9 50.026,5.426 U1.55
JTMS: J2.7 R7.2 U1.46 | length 19
  Top Layer w0.254: R7.2 51.194,15.906 53.1,14 53.1,11.952 J2.7 ; v1(53.1,1.2) 53.126,1.226 U1.46
  Bottom Layer w0.254: J2.7 52.299,10.668 53.467,9.5 53.467,1.567 v1(53.1,1.2)
JTRST: J2.3 R3.2 U1.56 | length 14.1
  Top Layer w0.254: R3.2 45.5,15.597 45.5,11.904 J2.3 46.736,10.664 49.9,7.5 49.9,6.1 49.526,5.726 U1.56
KEY_LED: R19.1 U1.4 | length 74.5
  Top Layer w0.254: R19.1 -27.1,4.2 -27.1,4.3 -26,5.4 27.4,5.4 v1(28.1,4.7) ; v1(32.4,4.8) 34.8,4.8 38.874,0.726 U1.4
  Bottom Layer w0.254: v1(28.1,4.7) 32.3,4.7 v1(32.4,4.8)
NetBAT1_1: BAT1.1 U3.8 | length 35.4
  Top Layer w0.5: v1(25.9,26.8) 25.9,22.9 26.8,22 31.3,22 32,21.3 32,13.2 33.516,11.684 U3.8
  Bottom Layer w0.5: v1(25.9,26.8) 25.9,36.3 27.1,37.5 BAT1.1
NetBEEP1_2: BEEP1.2 Q1.3 | length 10.1
  Top Layer w0.5: BEEP1.2 -52.574,-59.174 -51.711,-58.311 -51.711,-53.9 ; -51.711,-54.961 Q1.3
NetC1_1: C1.1 R2.1 U1.5 Y1.1 | length 15.9
  Top Layer w0.254: C1.1 C1.1@31.284,2.244 ; R2.1 C1.1@31.284,2.244 ; U1.5 37.366,0.226 Y1.1 31.496,2.032 C1.1@31.284,2.244
NetC02_2: C02.2 U08.2 U08.3 | length 7.8
  Top Layer w0.5: U08.3 U08.2 32.48,-37.98 33,-38.5 37.099,-38.5 C02.2
NetC06_1: C06.1 R06.1 U08.4 | length 8.6
  Top Layer w0.5: R06.1 29.5,-38.5 29.94,-38.06 U08.4 29.94,-33.31 30.25,-33 C06.1
NetC6_1: C6.1 R2.2 U1.6 Y1.2 | length 16.1
  Top Layer w0.254: C6.1 31.284,-3.768 R2.2 ; 31.332,-2.848 Y1.2 38.134,-0.274 U1.6
NetC06_2: C06.2 R07.2 | length 2
  Top Layer w0.5: C06.2 R07.2
NetC8_1: C8.1 L2.2 U1.13 | length 14.8
  Top Layer w0.254: C8.1 36.484,-10.216 36.55,-10.15 ; 36.616,-10.216 37.084,-10.216 37.6,-9.7 37.6,-8 41.826,-3.774 U1.13
  Top Layer w0.5: L2.2 35.216,-10.668 C8.1
NetC8_2: C8.2 L1.2 U1.12 | length 13.3
  Top Layer w0.254: C8.2 35.835,-8.565 36.235,-8.565 41.526,-3.274 U1.12
  Top Layer w0.5: L1.2 35.231,-8.128 C8.2
NetC17_2: C17.2 U3.2 Y2.2 | length 5.9
  Top Layer w0.5: C17.2 24.892,12.7 Y2.2 27.178,10.414 U3.2
NetC22_2: C22.2 U3.3 Y2.1 | length 6
  Top Layer w0.5: C22.2 24.892,6.604 Y2.1 27.432,9.144 U3.3
NetC24_1: C24.1 C25.2 D4.2 U5.1 | length 23.1
  Top Layer w1: D4.2 -65.024,-14.478 -64.374,-15.128 C24.1 -57.772,-16.345 -58.471,-16.345 -60.541,-16.345 -61.189,-16.993 -61.189,-18.898 -60.826,-19.26 C25.2 -57.919,-21.837 U5.1
  Top Layer w1.5: D4.2 D4.2@-65.01,-13.208
NetD4_1: D4.1 F14.2 | length 9.9
  Top Layer w1.5: D4.1 -65.024,-5.817 -63.795,-4.588 F14.2
NetD5_2: D5.2 L3.1 U5.2 | length 16.8
  Top Layer w1: -60.69,-24.56 U5.2
  Top Layer w2: D5.2@-68.954,-19.5 -68.954,-23.186 L3.1
  Top Layer w3: L3.1 -66.484,-24.56 -60.69,-24.56
NetF1_1: F1.1 R11.1 U2.7 | length 6
  Top Layer w0.5: U2.7 -10.884,37.574 R11.1 -9.7,36.39 F1.1
NetF2_1: F2.1 R11.2 U2.6 | length 5.8
  Top Layer w0.5: F2.1 -12.8,36.473 R11.2 -12.154,37.193 U2.6
NetJ1_3: J1.3 R5.2 | length 9.8
  Top Layer w0.254: J1.3 38.96,31.94 40.1,30.8 47.55,30.8 R5.2
NetJ5_2: J5.2 R51.1 | length 3.7
  Top Layer w0.254: R51.1 68.6,22.5 J5.2
NetJ5_3: J5.3 R52.1 R53.2 | length 9
  Top Layer w0.254: R53.2 v1(69,27.2) ; R52.1@67.75,23.15 R52.1 67.6,23.5 v1(69,23.5) 69.35,23.15 J5.3
  Bottom Layer w0.254: v1(69,23.5) v1(69,27.2)
NetJ08_1: J08.1 U08.8 | length 6.8
  Top Layer w0.5: J08.1 33.75,-47.54 U08.8
NetJ08_2: J08.2 R06.2 U08.5 | length 10.6
  Top Layer w0.5: R06.2 29.401,-40.151 29.94,-40.69 U08.5 29.94,-48.11 J08.2
NetLED1_1: LED1.1 LED2.1 LED3.1 LED4.1 R14.2 R15.2 | length 130.5
  Top Layer w1: R15.2 v1(-37.3,-2.818) R14.2@-36.192,-2.818
  Bottom Layer w0.254: LED4.1 -25.4,-52.9 -24.7,-53.6 6.8,-53.6 7.5,-52.9 LED3.1
  Bottom Layer w0.5: v1(-37.3,-2.818) -36.782,-2.3 -30.5,-2.3 -29.8,-3 -29.8,-21.8 -29.2,-22.4 -26.2,-22.4 -25.3,-23.3 LED2.1 -25.3,-39.2 -23.5,-41 -23.5,-48 -23.95,-48.45 LED4.1 ; LED3.1 6.35,-48.45 5.8,-47.9 5.8,-41 7.5,-39.3 LED1.1
NetLED1_2: LED1.2 LED2.2 LED3.2 LED4.2 Q2.3 | length 125.6
  Top Layer w0.5: Q2.3@-32.429,-3.6 -32.529,-3.5 v2(-31,-3.5)
  Bottom Layer w0.254: LED4.2 -27.686,-53.314 -26.7,-54.3 9.086,-54.3 9.786,-53.6 LED3.2
  Bottom Layer w0.5: v2(-31,-3.5) -31,-23.5 -30.116,-24.384 LED2.2 -27.586,-39.286 -29.3,-41 -29.3,-48.1 -28.95,-48.45 LED4.2 ; LED3.2 10.75,-48.45 11.3,-47.9 11.3,-41.1 9.786,-39.586 LED1.2
NetLED5_1: LED5.1 R18.1 | length 4.9
  Top Layer w0.5: R18.1 40.64,19.939 v1(40.64,18.3)
  Bottom Layer w0.5: LED5.1 v1(40.64,18.3)
NetLED5_2: LED5.2 U1.54 | length 20
  Top Layer w0.254: v1(50.526,2.6) U1.54
  Bottom Layer w0.254: LED5.2 40.64,11.26 42.9,9 44.534,9 46.234,7.3 49.9,7.3 50.526,6.674 v1(50.526,2.6)
NetQ1_1: Q1.1 R16.2 R17.2 | length 6.7
  Top Layer w0.5: R17.2 -52.528,-45.472 -50.75,-47.25 R16.2 ; Q1.1 -50.25,-49.663 R16.2 ; R16.2@-50,-47.25 R16.2
NetQ2_1: Q2.1 R19.2 R20.2 | length 5.3
  Top Layer w0.5: Q2.1 -31.493,-1.131 R20.2 ; -30.858,0.992 -28.022,0.992 -27.9,1.114
NetR1_1: R1.1 U1.60 | length 3.5
  Top Layer w0.254: R1.1 47.526,6.086 U1.60
NetR9_1: R9.1 U1.28 | length 10.1
  Top Layer w0.254: v1(51,-5.5) 51.026,-5.526 U1.28 ; R9.1 v1(53.848,-9.348)
  Bottom Layer w0.254: v1(51,-5.5) 53.392,-5.5 54.523,-6.631 54.731,-6.839 54.731,-8.465 v1(53.848,-9.348)
PA0: KEY1.33 KEY1.35 KEY1.37 U1.14 | length 100.3
  Top Layer w0.254: v1(41.8,-4.7) 42.226,-4.274 U1.14
  Top Layer w0.5: KEY1.37 -36.107,8.207 -35,7.1 v1(-3.3,7.1) v1(4.1,7.1)
  Bottom Layer w0.254: 35.893,13.429 37.1,12.222 37.1,6.2 42.7,0.6 42.7,-4.4 42.4,-4.7 v1(41.8,-4.7)
  Bottom Layer w0.5: v1(-3.3,7.1) -3.107,7.293 KEY1.35 ; v1(4.1,7.1) 29.3,7.1 29.893,7.693 KEY1.33
PA9_U1_TX: J21.2 U1.42 | length 21.8
  Top Layer w0.254: U1.42 57.2,-0.774 62.726,-0.774 64.9,1.4 64.9,10.3 65.164,10.564 J21.2
PA10_U1_RX: J21.1 U1.43 | length 22.8
  Top Layer w0.254: U1.43 62.508,-0.274 ; 62.516,-0.266 64.392,1.61 64.392,10.77 J21.1
PB0: KEY1.1 KEY1.3 KEY1.5 KEY1.7 U1.26 | length 123.2
  Top Layer w0.254: 19.3,-21.7 19.3,-26.3 20.963,-27.963 37.803,-27.963 38.476,-27.29 38.476,-20.369 50.018,-8.827 50.018,-8.75 ; 50.026,-8.75 U1.26
  Top Layer w0.5: KEY1.7 -33.957,-20.043 -32.3,-21.7 -14,-21.7 ; KEY1.5@-14,-16.514 -14,-21.7 ; 3.043,-21.657 KEY1.3 ; KEY1.1 20.043,-20.957 19.3,-21.7 -14,-21.7
PB1: KEY1.9 KEY1.11 KEY1.13 KEY1.15 U1.27 | length 103.1
  Top Layer w0.254: KEY1.9 38.013,-28.471 38.984,-27.5 38.984,-20.579 50.526,-9.037 ; U1.27 50.526,-9.037 ; 50.534,-9.029 50.526,-9.037
  Top Layer w0.5: KEY1.15 -32.328,-30.1 -14,-30.1 ; KEY1.13@-14,-28.514 -14,-30.1 ; KEY1.11@3.1,-28.528 3.1,-30.1 ; KEY1.9 18.414,-30.1 3.1,-30.1 ; -14,-30.1 3.1,-30.1
PB10: KEY1.17 KEY1.19 KEY1.21 KEY1.23 U1.29 | length 148.4
  Top Layer w0.254: 18.543,-45.8 18.543,-49.043 21.463,-51.963 38.319,-51.963 39.492,-50.79 39.492,-20.79 51.518,-8.764 ; KEY1.17@20.043,-40.514 KEY1.17 ; 51.526,-8.764 U1.29
  Top Layer w0.5: KEY1.23 -33.957,-44.643 -32.8,-45.8 3.4,-45.8 ; -13.957,-45.757 KEY1.21 ; KEY1.19 3.4,-40.828 3.4,-45.8 ; KEY1.17@20,-40.514 20,-44.343 18.543,-45.8 3.4,-45.8
PB11: KEY1.25 KEY1.27 KEY1.29 KEY1.31 U1.30 | length 127.6
  Top Layer w0.254: KEY1.25 38.529,-52.471 40,-51 40,-21 46.75,-14.25 46.758,-14.25 52.018,-8.99 ; 52.026,-8.974 U1.30
  Top Layer w0.5: KEY1.31 -32.428,-54 -14,-54 ; KEY1.29@-14,-52.514 -14,-54 ; KEY1.27@3.2,-52.628 3.2,-54 ; KEY1.25 18.514,-54 3.2,-54 ; -14,-54 3.2,-54
PB12: KEY1.8 KEY1.16 KEY1.24 KEY1.32 KEY1.38 U1.33 | length 184.5
  Top Layer w0.254: KEY1.8 -36.886,-13.4 v1(30.2,-13.4) ; v1(54.826,-6) U1.33
  Bottom Layer w0.254: v1(30.2,-13.4) 42.3,-13.4 44.7,-11 53.8,-11 53.808,-10.992 ; 53.8,-10.992 53.808,-10.992 ; v1(54.826,-6) 55,-6 55.5,-6.5 55.5,-10.25 54.758,-10.992 53.808,-10.992
  Bottom Layer w0.5: -41.971,-16.471 KEY1.8 ; KEY1.32 -42,-50.428 -42,-40.471 ; KEY1.24 -42,-40.471 ; KEY1.16 -42,-28.471 ; KEY1.38 -30.107,8.393 -30.6,7.9 -40.6,7.9 -42,6.5 -42,-28.471 ; -42,-40.471 -42,-28.471
PB13: KEY1.6 KEY1.14 KEY1.22 KEY1.30 KEY1.36 U1.34 | length 182.4
  Top Layer w0.254: KEY1.6 -17.686,-14.2 v1(29.3,-14.2) ; U1.34 56.074,-4.774 56.3,-5 v1(56.3,-6.5)
  Bottom Layer w0.254: v1(29.3,-14.2) 42.5,-14.2 45.2,-11.5 55.3,-11.5 56.3,-10.5 v1(56.3,-6.5)
  Bottom Layer w0.5: -21.871,-28.471 KEY1.14 ; -21.829,-16.471 KEY1.6 ; -21.771,-40.471 KEY1.22 ; KEY1.30 -21.9,-50.528 -21.9,-16.471 -21.9,-7.8 -24.9,-4.8 -24.9,3.2 -22.5,5.6 1.4,5.6 2.9,7.1 KEY1.36@2.9,10.922
PB14: KEY1.4 KEY1.12 KEY1.20 KEY1.28 KEY1.34 U1.35 | length 178.1
  Top Layer w0.254: KEY1.4 -1.386,-14.9 v1(28.4,-14.9) ; U1.35 56.474,-4.274 56.9,-4.7 v1(56.9,-7.2)
  Bottom Layer w0.254: v1(28.4,-14.9) 42.8,-14.9 45.6,-12.1 55.6,-12.1 56.9,-10.8 v1(56.9,-7.2)
  Bottom Layer w0.5: -4.971,-16.471 KEY1.4 ; -4.871,-40.471 KEY1.20 ; -4.871,-28.471 KEY1.12 ; KEY1.28 -5,-50.428 -5,-7.7 -3.3,-6 3,-6 4.9,-4.1 4.9,4.7 6.2,6 35,6 35.893,6.893 KEY1.34
PB15: KEY1.2 KEY1.10 KEY1.18 KEY1.26 U1.36 | length 95.7
  Top Layer w0.254: KEY1.2 14.914,-15.6 v1(27.5,-15.6) ; U1.36 56.874,-3.774 57.5,-4.4 v1(57.5,-7.8)
  Bottom Layer w0.254: v1(27.5,-15.6) 43.1,-15.6 46,-12.7 56,-12.7 57.5,-11.2 v1(57.5,-7.8)
  Bottom Layer w0.5: 12.529,-28.471 KEY1.10 ; KEY1.18@14.014,-40.5 12.5,-40.5 ; KEY1.26 12.5,-50.928 12.5,-40.5 ; KEY1.2 12.5,-18.014 12.5,-40.5
PC0: J1.14 U1.8 | length 88.4
  Top Layer w0.254: U1.8 v1(45.445,-1.274)
  Bottom Layer w0.254: J1.14 40.2,46.12 34.72,46.12 33.784,45.184 33.784,26.169 35.769,24.184 55.7,24.184 56.36,23.524 56.36,-0.6 55.991,-0.969 45.939,-0.969 45.634,-1.274 v1(45.445,-1.274)
PC1: J1.13 U1.9 | length 84.3
  Top Layer w0.254: U1.9 46.026,-1.774 v1(46.2,-1.6)
  Bottom Layer w0.254: J1.13 35.5,44.82 34.292,43.612 34.292,26.379 35.979,24.692 55.91,24.692 56.868,23.734 56.868,-1 56.268,-1.6 v1(46.2,-1.6)
PC2: J1.12 U1.10 | length 86.6
  Top Layer w0.254: U1.10 v1(47.053,-2.274)
  Bottom Layer w0.254: J1.12 40.28,43.5 36,43.5 34.8,42.3 34.8,26.59 36.19,25.2 56.121,25.2 57.376,23.945 57.376,-1.69 56.8,-2.266 ; v1(47.053,-2.274) 56.8,-2.274
PC3: J1.11 U1.11 | length 82.8
  Top Layer w0.254: U1.11 v1(48.128,-2.774)
  Bottom Layer w0.254: J1.11 36.3,42.22 35.308,41.228 35.308,26.8 36.4,25.708 56.331,25.708 57.884,24.155 57.884,-2 57.11,-2.774 v1(48.128,-2.774)
PC4: J1.10 U1.24 | length 83.6
  Top Layer w0.254: U1.24 v1(49.026,-5.5)
  Bottom Layer w0.254: J1.10 40.24,41 36.7,41 35.816,40.116 35.816,27.1 36.7,26.216 56.542,26.216 58.392,24.366 58.392,-3.4 57.692,-4.1 49.313,-4.1 48.895,-4.518 48.895,-5.369 v1(49.026,-5.5)
PC5: J1.9 U1.25 | length 78.6
  Top Layer w0.254: U1.25 v1(49.526,-4.779)
  Bottom Layer w0.254: J1.9 37.3,39.74 36.324,38.764 36.324,27.31 36.91,26.724 56.752,26.724 58.9,24.576 58.9,-3.7 57.821,-4.779 v1(49.526,-4.779)
PC6: J1.8 U1.37 | length 63.5
  Top Layer w0.254: U1.37 v1(60.25,-3.274)
  Bottom Layer w0.254: J1.8 42.292,36.408 59.11,36.408 59.916,35.602 59.916,-1.974 60.281,-2.339 60.281,-3.243 v1(60.25,-3.274)
PC7: J1.7 U1.38 | length 64.2
  Top Layer w0.254: U1.38 59.476,-2.774 v1(59.65,-2.6)
  Bottom Layer w0.254: J1.7 40.26,35.9 58.9,35.9 59.408,35.392 59.408,-2.358 v1(59.65,-2.6)
PC10: J1.4 U1.51 | length 58.8
  Top Layer w0.254: J1.4 40.22,33.4 37.4,33.4 36.758,32.758 36.758,26.565 37.065,26.258 56.21,26.258 57.508,24.96 57.508,8.258 56.5,7.25 52.25,7.25 52.026,7.026 U1.51
PC11: J1.5 U1.52 | length 57.4
  Top Layer w0.254: J1.5 37.06,34.66 36.25,33.85 36.25,26.355 36.855,25.75 56,25.75 57,24.75 57,8.468 56.29,7.758 52.04,7.758 51.534,7.252 ; U1.52 51.526,7.252
PC12: J1.6 U1.53 | length 64.6
  Top Layer w0.254: v1(37,35.941) 36.6,35.941 35.742,35.083 35.742,26.144 36.644,25.242 55.79,25.242 56.492,24.54 56.492,8.679 56.079,8.266 51.624,8.266 51.026,7.668 U1.53
  Bottom Layer w0.254: v1(37,35.941) 37,34 37.6,33.4 40.24,33.4 J1.6
RESET: C23.1 J2.4 K1.1 R10.1 U1.7 | length 63.5
  Top Layer w0.254: 42.35,-0.95 42.526,-0.774 U1.7 44.826,-0.774 v1(45.4,-0.2)
  Top Layer w0.5: K1.1@22.86,-2.436 22.86,-4.16 24.7,-6 37.3,-6 42.35,-0.95
  Top Layer w1: K1.1@22.86,-2.436 24.788,-0.508 C23.1 R10.1 24.892,2.032 K1.1@22.86,4.064
  Bottom Layer w0.254: v1(45.4,-0.2) 51.1,-0.2 51.8,0.5 51.8,6.6 50.3,8.1 46.5,8.1 45.5,9.1 45.5,11.972 J2.4
RS485_RE: U1.15 U2.2 U2.3 | length 106.2
  Top Layer w0.254: U2.3 U2.2 ; v1(42.6,-6.1) 42.4,-5.9 42.4,-5 42.626,-4.774 U1.15
  Top Layer w0.5: v1(-10.884,42.684) U2.2
  Bottom Layer w0.254: v1(-10.884,42.684) -10.592,42.976 16.5,42.976 17.584,41.892 17.584,21.698 19.082,20.2 37.7,20.2 38,19.9 38,6.3 43.4,0.9 43.4,-5.3 v1(42.6,-6.1)
RS485_RX: U1.17 U2.1 | length 102.9
  Top Layer w0.254: v1(44.526,-7.074) U1.17
  Top Layer w0.5: v1@-9.614,44.284 U2.1
  Bottom Layer w0.254: v1(-9.606,44.284) -9.314,43.992 16.921,43.992 18.6,42.313 18.6,22.2 19.4,21.4 38.2,21.4 39.2,20.4 39.2,7 44.526,1.674 v1(44.526,-7.074)
RS485_TX: U1.16 U2.4 | length 105.5
  Top Layer w0.254: v1@43.7,-6.1 v1(43.726,-6.074) U1.16
  Top Layer w0.5: v1@-13.424,43.484 U2.4
  Bottom Layer w0.254: v1(-13.406,43.484) -2.006,43.484 16.71,43.484 18.092,42.102 18.092,21.908 19.2,20.8 37.9,20.8 38.6,20.1 38.6,6.7 44,1.3 44,-5.8 v1(43.726,-6.074)
SPI1_MISO: U1.22 U8.2 | length 31.8
  Top Layer w0.254: U8.2 v1(28.48,-21.77) ; v1(36.75,-23.5) 37.46,-22.79 37.46,-19.948 48.026,-9.382 U1.22
  Bottom Layer w0.254: v1(28.48,-21.77) 30.21,-23.5 v1(36.75,-23.5)
SPI1_MOSI: U1.23 U8.5 | length 24.8
  Top Layer w0.254: U8.5 36.908,-24.31 37.968,-23.25 37.968,-20.158 48.526,-9.6 U1.23
SPI1_SCK: U1.21 U8.6 | length 22.7
  Top Layer w0.254: U8.6 36.162,-23.04 36.952,-22.25 36.952,-19.737 47.526,-9.163 U1.21
USB_D+: C52.1 R52.2 U1.45 | length 33.3
  Top Layer w0.254: U1.45 61.974,0.726 ; 61.982,0.734 63.376,2.128 63.376,20.927 R52.2 65.849,25.274 C52.1
USB_D-: C51.1 R51.2 U1.44 | length 32.7
  Top Layer w0.254: U1.44 62.289,0.226 ; 62.2,0.234 63.884,1.918 63.884,20.584 64.7,21.4 R51.2 65.849,19.526 C51.1
VCC+3.3V: C4.2 C5.2 C9.2 C10.2 C11.2 C12.2 C13.2 C14.2 C15.1 C16.1 C20.2 C21.2 C48.2 C75.1 C76.1 J2.1 J2.2 L2.1 R3.1 R4.1 R6.1 R7.1 R10.2 R12.2 R13.2 R18.2 R43.1 R53.1 U1.19 U1.32 U1.48 U1.64 U2.8 U3.1 U4.8 U8.3 U8.7 U8.8 U21.2 U21.4 | length 389
  Top Layer w0.254: U4.8 33.796,18.796 33.2,18.2 33.2,14.3 34,13.5 36.1,13.5 37.027,12.573 38.1,12.573 R13.2 ; C11.2 42.849,-10.151 v1(44.413,-8.587) 46.014,-8.587 46.526,-8.075 U1.19 ; U1.48@54.8,2.226 U1.48
  Top Layer w0.5: C76.1 -66,10.5 C75.1 ; C15.1 -1.604,42.004 -0.8,41.2 -0.8,28.6 ; R10.2 28.283,3.683 30.7,6.1 33.4,6.1 34,6.1 ; U8.3 31.75,-23.04 32.5,-22.29 32.5,-21.25 ; v2(28.232,-10.668) L2.1 30.48,-11.98 31.751,-13.251 C48.2 31.751,-19.751 32.5,-20.5 ; U8.7 33.02,-21.77 32.5,-21.25 ; U8.8 32.5,-20.5 ; U4.8 35.052,20.748 ; R12.2 38.4,18.615 38.4,20.528 R18.2 38.1,22.1 38.464,22.464 C4.2 45.452,22.223 C5.2 ; C12.2 40.331,4.5 45.3,4.5 45.3,2.9 46.3,1.9 52,1.9 ; J2.2 43,14.404 43,19.6 43.702,20.302 C5.2@45.098,20.302 ; C9.2 56.134,-7.934 55.3,-7.1 53.2,-7.1 53.2,-6.1 52,-4.9 v1(52,-3.45) 52,1.9 ; R53.1 62.2,27.2 61,26 61,4.951 C14.2 60.653,4.858 C10.2 55.458,4.858 54.8,4.2 54.8,2.4 53.7,2.4 53.2,1.9 52,1.9 ; 32.5,-21.25 32.5,-20.5
  Top Layer w1: U21.2 -58.8,10.5 ; U21.4 -58.8,10.5 ; -9.206,40.384 -7.006,40.384 -6.566,40.824 C15.1 ; 21.9,28.4 21.9,16.3 22.706,15.494 C21.2 26.416,13.984 28.716,11.684 U3.1 31.316,11.684 32.4,10.6 32.4,7.1 33.4,6.1 38.731,6.1 C12.2 ; R18.2 34.972,20.828 34,21.8 34,27.2 32.7,28.5 -62.2,28.5 -64,26.7 C75.1 -60.75,10.5 -58.8,10.5 ; J2.1 J2.2 ; C5.2@45.098,20.302 R3.1 R4.1 R6.1 R7.1
  Bottom Layer w0.4: 47.75,-3.478 51.972,-3.478 v1(52,-3.45)
  Bottom Layer w0.5: v2(28.232,-10.668) 28.232,-9.168 28.813,-8.587 v1(44.413,-8.587) 45.5,-7.5 45.5,-4 46.022,-3.478 47.75,-3.478
  other v2: -60.75,9 -56.75,9 -56.75,10.5
VCC+5V: BEEP1.1 C2.2 C07.2 C08.1 C31.1 C32.2 C73.1 C74.1 J1.1 J5.1 L3.2 R5.1 R14.1 R15.1 U5.4 U08.6 U21.3 | length 401.7
  Top Layer w0.4: v2(69.9,17.3) 69.9,21.5 70.25,21.85 J5.1
  Top Layer w0.5: U5.4 -54.29,-27.96 -53.75,-28.5 -53.75,-32.75 -54.528,-33.528 C32.2 -56.261,-37.262 -56.703,-37.704 ; U08.6 31.21,-40.29 v2(31.75,-39.75) ; J1.1 39,28 39.5,27.5 51.75,27.5 R5.1 ; C07.2 48.349,-54.75 C08.1
  Top Layer w1: C31.1 -56.703,-37.704 21.5,-37.704 23.25,-39.454 23.25,-44 24.75,-45.5 v2(27.25,-45.5) ; U21.3 -54,6.5 -53.5,7 C73.1 -51,8 -50.25,7.25 v2(-50.25,-0.75) -50.032,-0.532 R15.1 R14.1 ; R5.1 54.35,30.1 v2(63.2,30.1)
  Top Layer w1.5: L3.2 -64.454,-32.508 -59.258,-37.704 C31.1
  Bottom Layer w0.5: BEEP1.1@-66.613,-52.161 -66.613,-49 -65.363,-47.75 -60.75,-47.75 -60.159,-47.159 -60.159,-40.091 C31.1
  Bottom Layer w1: C31.1 -51.454,-37.704 -50.25,-36.5 v2(-50.25,-0.75) ; v2(27.25,-45.5) 37.25,-45.5 46.5,-54.75 49,-54.75 ; v2(31.75,-39.75) 34,-39.75 49,-54.75 ; v2(63.2,30.1) 63.2,24 v2(69.9,17.3) 72.6,14.6 72.6,-38 55.85,-54.75 C08.1 49,-54.75
VCC+12V: F14.1 J7.4 | length 67.1
  Bottom Layer w1: F14.1 -53.838,19.9 -52.038,21.7 -23.2,21.7 -20.9,24 -17.5,24 -16.51,23.01 J7.4
pads on no net: J2.8 J5.0@71.275,21.15 J5.0@71.275,25.15 J5.0@73.425,21.95 J5.0@73.425,24.35 J5.4 J7. J7.1 J7.2 J7.3 J7.6 U1.1 U1.39 U1.40 U1.41

## Polygon pours and split planes (outlines as drawn)
GND on Top Layer "Top Layer-No Net" (solid, remove dead copper, pour order 8): -72.993,53.1 -74,52.108 -74,45.163 -74,-60.008 -72.993,-61 -69.973,-61 -50.844,-61 -49.837,-60.008 -49.837,-58.023 -49.837,-56.039 -48.83,-55.047 -45.81,-55.047 47.823,-55.047 48.83,-56.039 48.83,-58.023 48.83,-60.008 49.837,-61 51.85,-61 72.993,-61 74,-60.008 74,-57.031 74,52.108 72.993,53.1
VCC+3.3V on Top Layer "Top Layer-No Net" (solid, pour order 2): -62,8.24 -61.75,8 -60.25,8 -56.25,8 -56,8 -55.75,8.24 -55.75,8.958 -55.75,13.51 -56,13.75 -58,13.75 -61.5,13.75 -62,13.271
GND on Bottom Layer "Top Layer-No Net" (solid, remove dead copper, pour order 10): -73,53.2 -74,52.207 -74,-60.007 -73,-61 -51,-61 -50,-60.007 -50,-56.035 -49,-55.042 -45,-55.042 48,-55.042 49,-56.035 49,-60.007 50,-61 52,-61 73,-61 74,-60.007 74,-58.021 74,52.207 73,53.2
VCC+3.3V on Bottom Layer "Top Layer-No Net" (solid, pour order 4): -61.5,13.75 -62,13.25 -62,8.25 -61.75,8 -56,8 -55.75,8.25 -55.75,13.5 -56,13.75

## Other copper
Top Layer:
  rectangle net VCC+3.3V: 40.2,4.5 45.6,4.9
  region net VCC+3.3V: 45.1,3.6 45.526,4.026 44.826,4.726 44.4,4.3
  region net VCC+3.3V: 55.1,2.1 55.35,2.35 55,2.7 54.75,2.45
  region net VCC+3.3V: 53.65,-7.15 53.9,-6.9 53.45,-6.45 53.2,-6.7
  region net VCC+3.3V: 51.75,1.15 52,1.4 51.45,1.95 51.2,1.7
  region net VCC+3.3V: 52.2,1.2 52.65,1.65 52.4,1.9 51.95,1.45
Multi-Layer:
  pour cut-out: -30.5,51.2 -25.5,51.2 -25.5,47.2 -30.5,47.2
  pour cut-out: -2,51.2 3,51.2 3,47.2 -2,47.2
  pour cut-out: 27.5,51.2 32.5,51.2 32.5,47.2 27.5,47.2
  pour cut-out: -30.5,27.2 -25.5,27.2 -25.5,23.2 -30.5,23.2
  pour cut-out: -2,27.2 3,27.2 3,23.2 -2,23.2
  pour cut-out: 27.5,27.2 32.5,27.2 32.5,23.2 27.5,23.2

## Silkscreen, mask and mechanical layers (free items; w line width, h text height)
Top Overlay:
  circle w0.1: c-68.5,-50.8 r1.404
  circle w0.1: c-60.5,-55.6 r6.5
  circle w0.1: c-26.4,-18.5 r2.5
  circle w0.1: c8.6,-18.5 r2.5
  circle w0.1: c-26.4,-42.5 r2.5
  circle w0.1: c8.6,-42.5 r2.5
  circle w0.1: c-16.9,14.8 r3
  circle w0.1: c16.9,14.8 r3
  lines w0.1: 68.8,9.3 70.7,9.3 ; 68.8,11.9 70.7,11.9 ; 68.8,5.7 70.7,5.7 70.7,15.1 68.8,15.1 68.8,5.7
  lines w0.254: 25,5.2 25,-25 -25,-25 -25,25 25,25 25,13.9 ; 74.5,17.5 61.5,17.5 61,18 61,18.5 61,28.5 61.5,29 74.5,29
  lines w0.5: 43.4,12 55.1,12 ; 47,9.1 51.6,9.1
  lines w1.5: 34.1,-4.4 34.1,3.6 ; 37,-4.4 37,3.6
  lines w2: -72,-28.8 -62,-28.8
  text "RX" at 70.3,12.6 h1 r90
  text "TX" at 70.3,9.7 h1 r90
  text "GND" at 70.3,6.1 h1 r90
  text "e-lin" at 2.743,-1.803 h8
  text "Security terminal V1.21" at -24.3,-10.4 h4.5
  text "20150312" at -5.7,-14.6 h3
  text "SPK+" at 36,-49 h1.5
  text "SPK-" at 21.6,-49.2 h1.5
  text "+" at -68.25,-52 h2 r60
Bottom Overlay:
  lines w0.254: -58.5,49.6 -58.5,24.6 58.5,24.6 58.5,49.6 ; -51.54,-44.831 -50.39,-44.831 ; -50,24.85 -50,49.85 ; -49.55,-48 -49.55,-4.9 26.51,-4.9 26.51,-56 ; -48.35,-47.95 -48.35,-23.2 -48.35,-6.1 19,-6.1 ; -27.05,-55.1 25.31,-55.1 25.31,-15.9 25.31,-6.3 ; 50,24.35 50,49.35
  lines w0.8: -12.7,20.5 -12.7,23.5
Mechanical 1:
  lines w0.254: -48.625,-62.125 -49,-62.5 ; -47.875,-61.375 -47.5,-61 ; 47.719,-61.219 47.5,-61 ; -75,-61 -75,-61 ; -75,-61 -73.5,-62.5 -49,-62.5 ; -75,-61 -75,52 -73,54 73,54 75,52 75,-61 73.5,-62.5 ; -49,-62.5 -49,-62.5 ; -49,-62.5 -47.5,-61 ; -47.5,-61 -47.5,-57.5 -46.25,-56.25 46,-56.25 47.5,-57.75 47.5,-61 ; 47.5,-61 47.5,-61 ; 47.5,-61 49,-62.5 73.5,-62.5 ; 73.5,-62.5 73.5,-62.5

## Text inside footprints (layer, text, board x,y; h text height)
KEY1: Bottom Overlay "A" at 37.1,14.2 h1; Bottom Overlay "B" at 5,14.3 h1; Bottom Overlay "C" at -28.1,14.2 h1; Bottom Overlay "1" at 22.2,-13.132 h1; Bottom Overlay "2" at 5.6,-13.3 h2; Bottom Overlay "3" at -11.3,-13.4 h2; Bottom Overlay "4" at 22.8,-25 h2; Bottom Overlay "5" at 5.5,-25 h2; Bottom Overlay "6" at -11.4,-25 h2; Bottom Overlay "7" at 22.7,-37.4 h2; Bottom Overlay "8" at 6.1,-37.5 h2; Bottom Overlay "9" at -11.1,-37.4 h2; Bottom Overlay "*" at 22.3,-49.2 h2; Bottom Overlay "0" at 5.6,-49.4 h2; Bottom Overlay "#" at -10.9,-49.1 h2; Bottom Overlay "F1" at -30.2,-13.4 h2; Bottom Overlay "F2" at -29.6,-25.5 h2; Bottom Overlay "F3" at -29.7,-37.3 h2; Bottom Overlay "F4" at -29.7,-49.5 h2